# Altium PCB encoder.PcbDoc
Units mm, origin at the board's own origin, x right, y up, seen from the top; angles counter-clockwise.
Board outline 40.68 x 15.71 mm, 2 copper layers (Top Layer, Bottom Layer); 2 components, 4 nets, 12 pads, 0 vias.
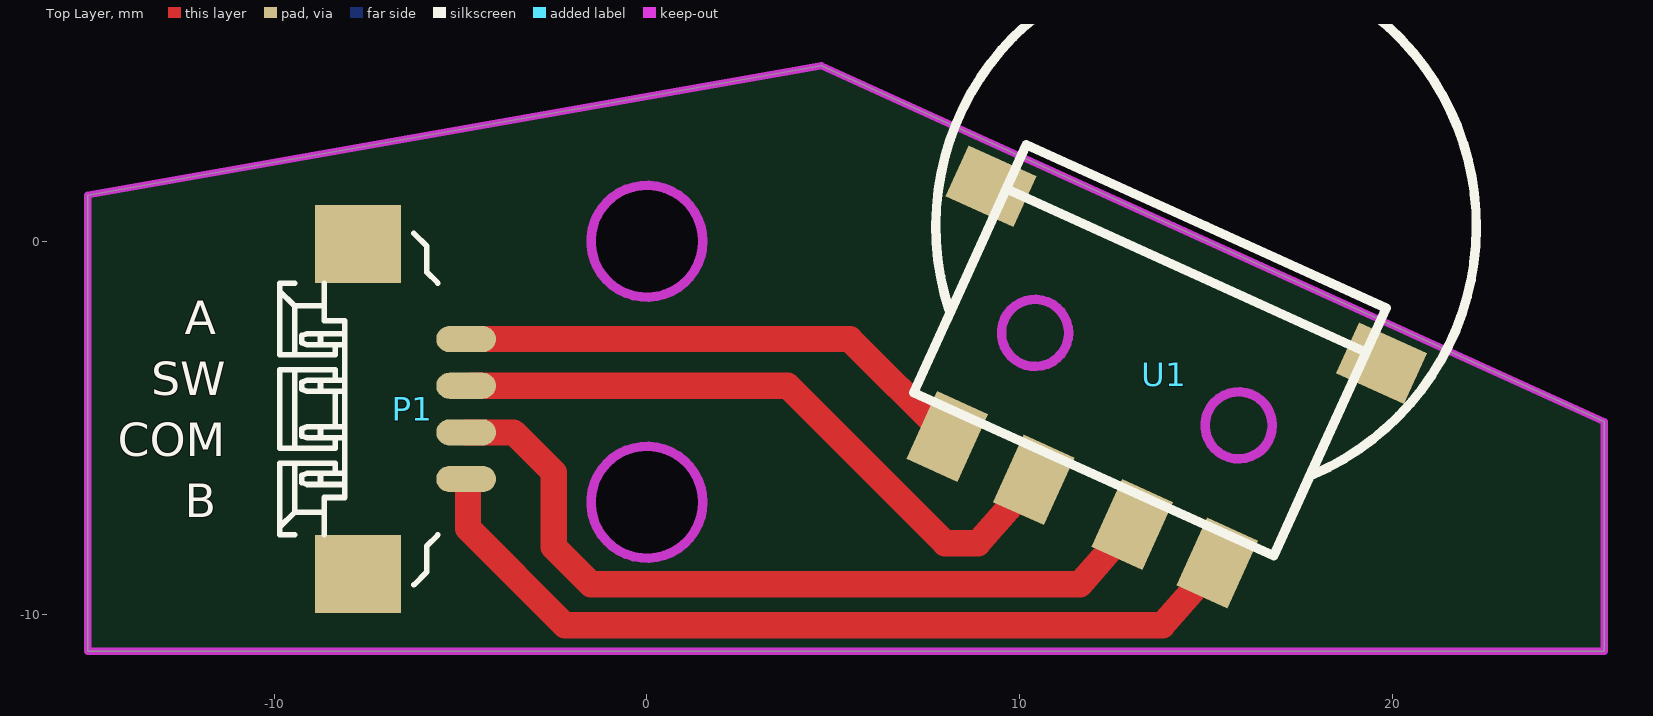
[diagram p0: Top Layer view]
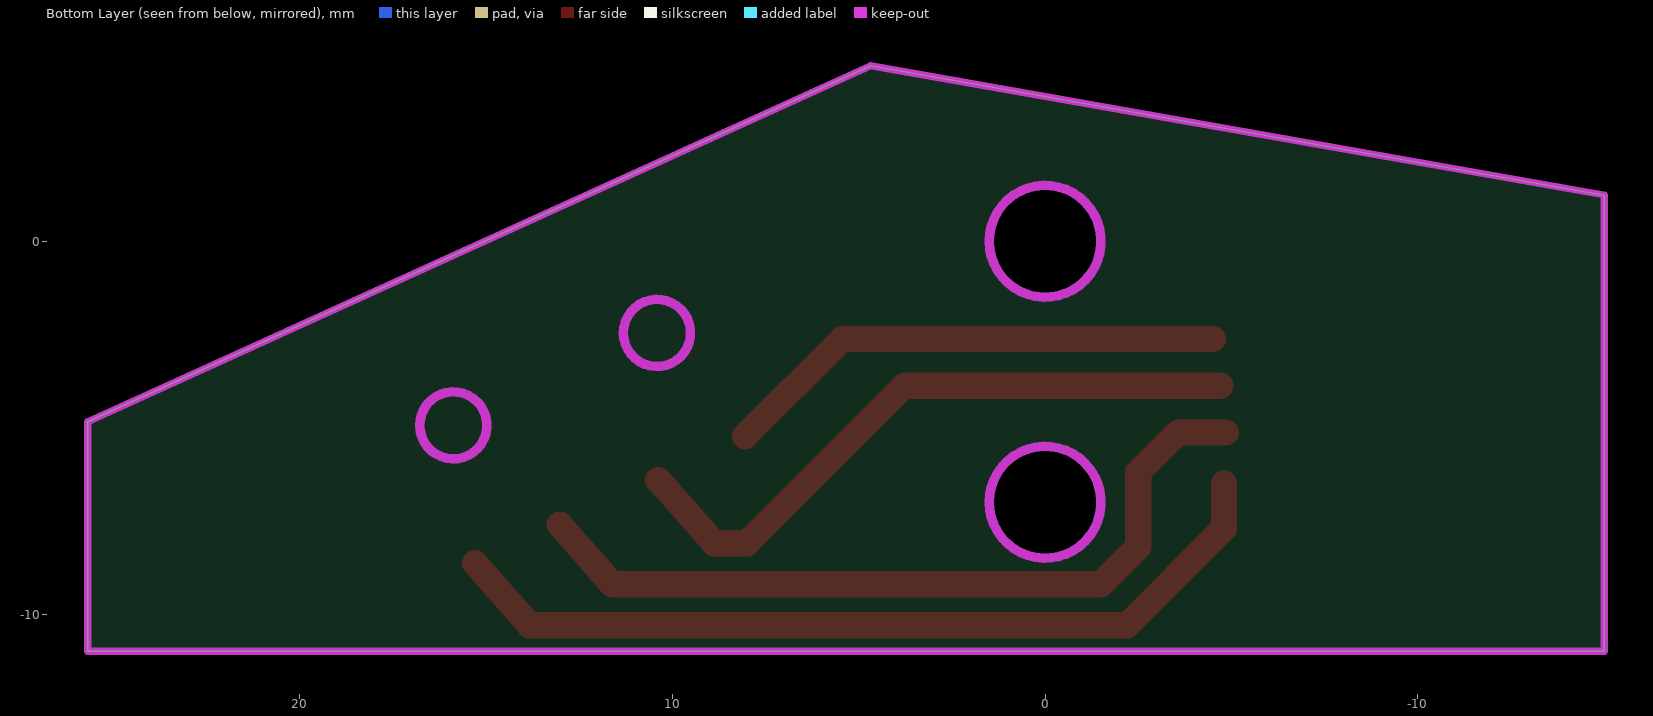
[diagram p1: Bottom Layer view, seen from below]

## Layer stack, top to bottom
Top Layer: signal copper 0.0356
Dielectric: dielectric 0.32, FR-4, Dk 4.8
Bottom Layer: signal copper 0.0356

## Board outline
-15,-11 -15,1.24 4.68,4.71 25.68,-4.84 25.68,-11
cut-out: -1.5,-7 ccw(c0,-7) 0,-8.5 ccw(c0,-7) 1.5,-7 ccw(c0,-7) 0,-5.5 ccw(c0,-7)
cut-out: -1.5,0 ccw(c0,0) 0,-1.5 ccw(c0,0) 1.5,0 ccw(c0,0) 0,1.5 ccw(c0,0)

## Design rules (kind name [scope] priority, off if disabled: settings)
Clearance [All] p1: gap=0.2
ComponentClearance [All] p1 off: gap=0.254 collisioncheckmode=3 verticalgap=0.254 showdistances=FALSE
PolygonConnect [All] p1: connectstyle=Direct reliefconductorwidth=0.254 reliefentries=4 polygonreliefangle="90 Angle"
RoutingVias [All] p1: holewidth=0.3 width=0.6 viastyle="Through Hole" minholewidth=0.3 minwidth=0.6 maxholewidth=0.3 maxwidth=0.6
SilkscreenOverComponentPads [All] p1: minsilkscreentomaskgap=0.254
SolderMaskExpansion [All] p1: expansion=0.102
Width [All] p1: maxlimit=3 minlimit=0.2 preferedwidth=0.2
26 further rules are at their usual default settings.

## Components (designator, comment, footprint, x,y, rotation, side; value= is the part's Value field where it differs from the comment)
P1 "" "MX1.25-4P 卧" -6.3,-4.5 r90 top
U1 "SIQ-02FVS3滚轮编码器" 美上美SIQ-02FVS3滚轮编码器 15,0.4 r335.6 top

## Footprints (in the part's own frame and the unit in brackets; to place one, negate y for a bottom-side part, rotate by r counter-clockwise, add the part's x,y. Pads: shape width x height; smd on the part's side, far side on the other; paste and mask are expansions set on the pad)
"MX1.25-4P 卧" [mm]
  rect 2.1x2.3 smd: 0(-4.425,1.45) 0(4.425,1.45)
  oval 0.7x1.6 smd: 1(1.875,-1.45) 2(0.625,-1.45) 3(-0.625,-1.45) 4(-1.875,-1.45)
  silkscreen extent -4.71,-0.69 4.71,3.55
美上美SIQ-02FVS3滚轮编码器 [mm]
  rect 2x1.5 smd: 0(-5.7,-1.4) 0(5.8,-1.4)
  rect 1.5x2 smd: 1(-4,-8) 2(-1.4,-8.1) 3(1.5,-8.1) 4(4,-8.1)
  Keep-Out Layer circle w0.254: c-3,-4.5 r0.9
  Keep-Out Layer circle w0.254: c3,-4.5 r0.9
  silkscreen extent -7.25,-7.3 7.25,7.25

## Part data
P1: library part "Header 4", "Header, 4-Pin"

## Nets (pads, with @x,y where several pads share a name; then routed paths per layer and width w, separated by ;. In a path a pad name is that pad's centre, name@x,y a point inside that pad or via, vN(x,y) a via of type N, cw(c..) or ccw(c..) an arc to the next point about the centre after c; other vN are vias at no path point)
NetP1_1: P1.1 U1.1 | length 13.6
  Top Layer w0.7: P1.1@-4.5,-2.625 5.444,-2.625 U1.1
NetP1_2: P1.2 U1.2 | length 17.6
  Top Layer w0.7: P1.2@-4.7,-3.875 3.775,-3.875 8,-8.1 8.877,-8.1 U1.2
NetP1_3: P1.3 U1.3 | length 21.5
  Top Layer w0.7: P1.3 -3.575,-5.125 -2.5,-6.2 -2.5,-8.2 -1.5,-9.2 11.616,-9.2 U1.3
NetP1_4: P1.4 U1.4 | length 23.1
  Top Layer w0.7: P1.4@-4.8,-6.5 -4.8,-7.7 -2.2,-10.3 13.826,-10.3 U1.4
pads on no net: P1.0 U1.0

## Keep-outs
Keep-Out Layer:
  circle w0.254: c0,0 r1.5
  circle w0.254: c0,-7 r1.5
  lines w0.2: -15,-11 -15,1.24 4.68,4.71 25.68,-4.84 25.68,-11 -15,-11

## Silkscreen, mask and mechanical layers (free items; w line width, h text height)
Top Overlay:
  text "A" at -12.401,-2.5 h0.9
  text "SW" at -13.3,-4.133 h0.9
  text "COM" at -14.2,-5.767 h0.9
  text "B" at -12.401,-7.4 h0.9